# EAGLE board ArduinoOnBoard (EAGLE 8.4.1)

Size 49.96 x 29.96 mm. Coordinates in mm from the lower left corner, seen from the top.
Outline: 0,0 49.96,0 49.96,29.96 0,29.96 0,0
Copper layers (1*16): Top 0.035mm / dielectric 1.5mm / Bottom 0.035mm
Design rules "default": minimum track width 6mil, minimum drill 0.35mm, track to track 6mil, track to pad 6mil, pad to pad 6mil, via to via 6mil, smd to smd 6mil, copper to edge 40mil, drill to drill 6mil, minimum pad ring 10mil, minimum via ring 8mil, stop-mask expansion 4mil, vias tented up to drill 0mil, thermal gap 10mil

## Footprints (pad centres in the part's own frame; a part is rotated, then mirrored left to right if it is on the bottom)
C1310 = smd 1 x 1.3: 1 -0.7,0; 2 0.7,0
JST-PH-2-SMT = smd 1 x 5.5: 1 -1,-1.8; 2 1,-1.8 | smd 1.6 x 3.4: NC1 -3.4,0; NC2 3.4,0
FE06 = drill 0.813 long: 1 -6.35,0; 2 -3.81,0; 3 -1.27,0; 4 1.27,0; 5 3.81,0; 6 6.35,0
DIL28-3-ROUND = drill 0.813 pad 1.676: 1 -16.51,-3.81; 2 -13.97,-3.81; 3 -11.43,-3.81; 4 -8.89,-3.81; 5 -6.35,-3.81; 6 -3.81,-3.81; 7 -1.27,-3.81; 8 1.27,-3.81; 9 3.81,-3.81; 10 6.35,-3.81; 11 8.89,-3.81; 12 11.43,-3.81; 13 13.97,-3.81; 14 16.51,-3.81; 15 16.51,3.81; 16 13.97,3.81; 17 11.43,3.81; 18 8.89,3.81; 19 6.35,3.81; 20 3.81,3.81; 21 1.27,3.81; 22 -1.27,3.81; 23 -3.81,3.81; 24 -6.35,3.81; 25 -8.89,3.81; 26 -11.43,3.81; 27 -13.97,3.81; 28 -16.51,3.81
SOT223 = smd 1.499 x 2.007: 1 -2.261,-3.15; 2 0.025,-3.15; 3 2.311,-3.15 | smd 3.81 x 2.007: 4 0,3.15
AVRISP = drill 0.9 pad 1.626: 1 -1.27,2.54; 2 1.27,2.54; 3 -1.27,0; 4 1.27,0; 5 -1.27,-2.54; 6 1.27,-2.54
47589-0001 = smd 1 x 0.3: 1 2.8,1.2; 2 2.8,0.6; 3 2.8,0; 4 2.8,-0.6; 5 2.8,-1.2 | drill 0.6 pad 0.95 long: CASING1 0,4.175; CASING2 0,-4.175 | drill 0.7 pad 1.1 long: CASING3 3,2.225; CASING4 3,-2.225
FE08 = drill 0.813 long: 1 -8.89,0; 2 -6.35,0; 3 -3.81,0; 4 -1.27,0; 5 1.27,0; 6 3.81,0; 7 6.35,0; 8 8.89,0
CHIPLED_0805 = smd 1.2 x 1.2: A 0,-1.05; C 0,1.05
QS = drill 0.61 long: 1 -2.54,0; 2 2.54,0
M1206 = smd 1.6 x 2: 1 -1.4,0; 2 1.4,0
SMS-001 = smd 1.092 x 2.007: 1 0,-4.496; 2 0,4.496
TACT_PANA-EVQ = drill 1.3 pad 2.54: P$1 -3.25,0; P$2 3.25,0

## Placement (x,y rotation side)
C1  22pF  [C1310]  44.2,6.6 270 top
C2  22pF  [C1310]  44.2,2.79 270 top
C3  10uF  [C1310]  40.39,6.6 270 top
C4  10uF  [C1310]  40.39,2.79 270 top
C5  100nF  [C1310]  7.62,22.61 90 top
C6  100nF  [C1310]  16.76,9.4 90 top
CN1  [JST-PH-2-SMT]  11.94,2.79 180 top
FTDI  [FE06]  3.3,20.32 90 top
IC1  ATMEGA328PROUND  [DIL28-3-ROUND]  29.21,20.32 0 top
IC2  REG1117  [SOT223]  33.27,4.57 90 top
ISP1  AVRISP-6  [AVRISP]  -13.97,6.35 0 top  (outside the outline)
MICRO-USB-B  MICRO-USB-RECEPTACLE47589-0001  [47589-0001]  2.29,6.86 0 top
PORTB  [FE06]  39.37,27.18 180 top
PORTC  [FE06]  19.05,27.18 180 top
PORTD  [FE08]  25.15,13.46 0 top
PWR  [CHIPLED_0805]  32.77,9.4 270 top
Q1  16MHz  [QS]  41.91,11.43 0 top
R1  10k  [M1206]  12.19,11.68 270 top
R2  330  [M1206]  27.69,9.91 180 top
S1  SWS001  [SMS-001]  21.59,6.35 270 top
SW1  [TACT_PANA-EVQ]  8.13,14.22 90 top

## Library data of the parts
C1-C6 = rcl; SPICEPREFIX: C
CN1 ISP1 PWR R1 R2 SW1 = adafruit
FTDI PORTB PORTC PORTD = con-lsta; OC_FARNELL: unknown; OC_NEWARK: unknown
IC1 = atmega328
IC2 = burr-brown; MPN: REG1117; OC_FARNELL: 1097566; OC_NEWARK: 14P6981
MICRO-USB-B = con-molex-usb
Q1 = special
S1 = smd-special

## Nets
A0: IC1.23 PORTC.1
A1: IC1.24 PORTC.2
A2: IC1.25 PORTC.3
A3: IC1.26 PORTC.4
A4: IC1.27 PORTC.5
A5: IC1.28 PORTC.6
D0: FTDI.2 IC1.2 PORTD.1
D1: FTDI.3 IC1.3 PORTD.2
D2: IC1.4 PORTD.3
D3: IC1.5 PORTD.4
D4: IC1.6 PORTD.5
D5: IC1.11 PORTD.6
D6: IC1.12 PORTD.7
D7: IC1.13 PORTD.8
D8: IC1.14 PORTB.1
D9: IC1.15 PORTB.2
D10: IC1.16 PORTB.3
D11: IC1.17 PORTB.4
D12: IC1.18 PORTB.5
D13: IC1.19 PORTB.6
GND: C1.2 C2.2 C3.2 C4.2 C6.2 CN1.2 FTDI.6 IC1.8 IC1.22 IC2.1 ISP1.6 MICRO-USB-B.CASING1 MICRO-USB-B.CASING2 MICRO-USB-B.CASING3 MICRO-USB-B.CASING4 PWR.C SW1.P$1
N$1: C5.1 FTDI.4
N$2: C1.1 IC1.9 Q1.1
N$3: C2.1 IC1.10 Q1.2
N$4: C3.1 IC2.3 S1.2
N$5: PWR.A R2.1
N$6: CN1.1 S1.1
RST: C5.2 IC1.1 R1.1 SW1.P$2
VCC: C4.1 C6.1 FTDI.1 IC1.7 IC1.20 IC2.2 ISP1.2 MICRO-USB-B.1 R1.2 R2.2

## Tracks (layer width: path | path; a pad name or v marks a point on that pad's centre or on a via)
A0  (1 unrouted)
A1  (1 unrouted)
A2  (1 unrouted)
A3  (1 unrouted)
A4  (1 unrouted)
A5  (1 unrouted)
D0  (2 unrouted)
D1  (2 unrouted)
D2  (1 unrouted)
D3  (1 unrouted)
D4  (1 unrouted)
D5  (1 unrouted)
D6  (1 unrouted)
D7  (1 unrouted)
D8  (1 unrouted)
D9  (1 unrouted)
D10  (1 unrouted)
D11  (1 unrouted)
D12  (1 unrouted)
D13  (1 unrouted)
GND  (16 unrouted)
N$1  (1 unrouted)
N$2  (2 unrouted)
N$3  (2 unrouted)
N$4  (2 unrouted)
N$5  (1 unrouted)
N$6  (1 unrouted)
RST  (3 unrouted)
VCC  (9 unrouted)